# Altium PCB Device.PcbDoc (part 1 of 2)
Units mil, origin at the board's own origin, x right, y up, seen from the top; angles counter-clockwise.
Board outline 1614.17 x 1181.1 mil, 2 copper layers (Top Layer, Bottom Layer); 72 components, 59 nets, 280 pads, 52 vias.
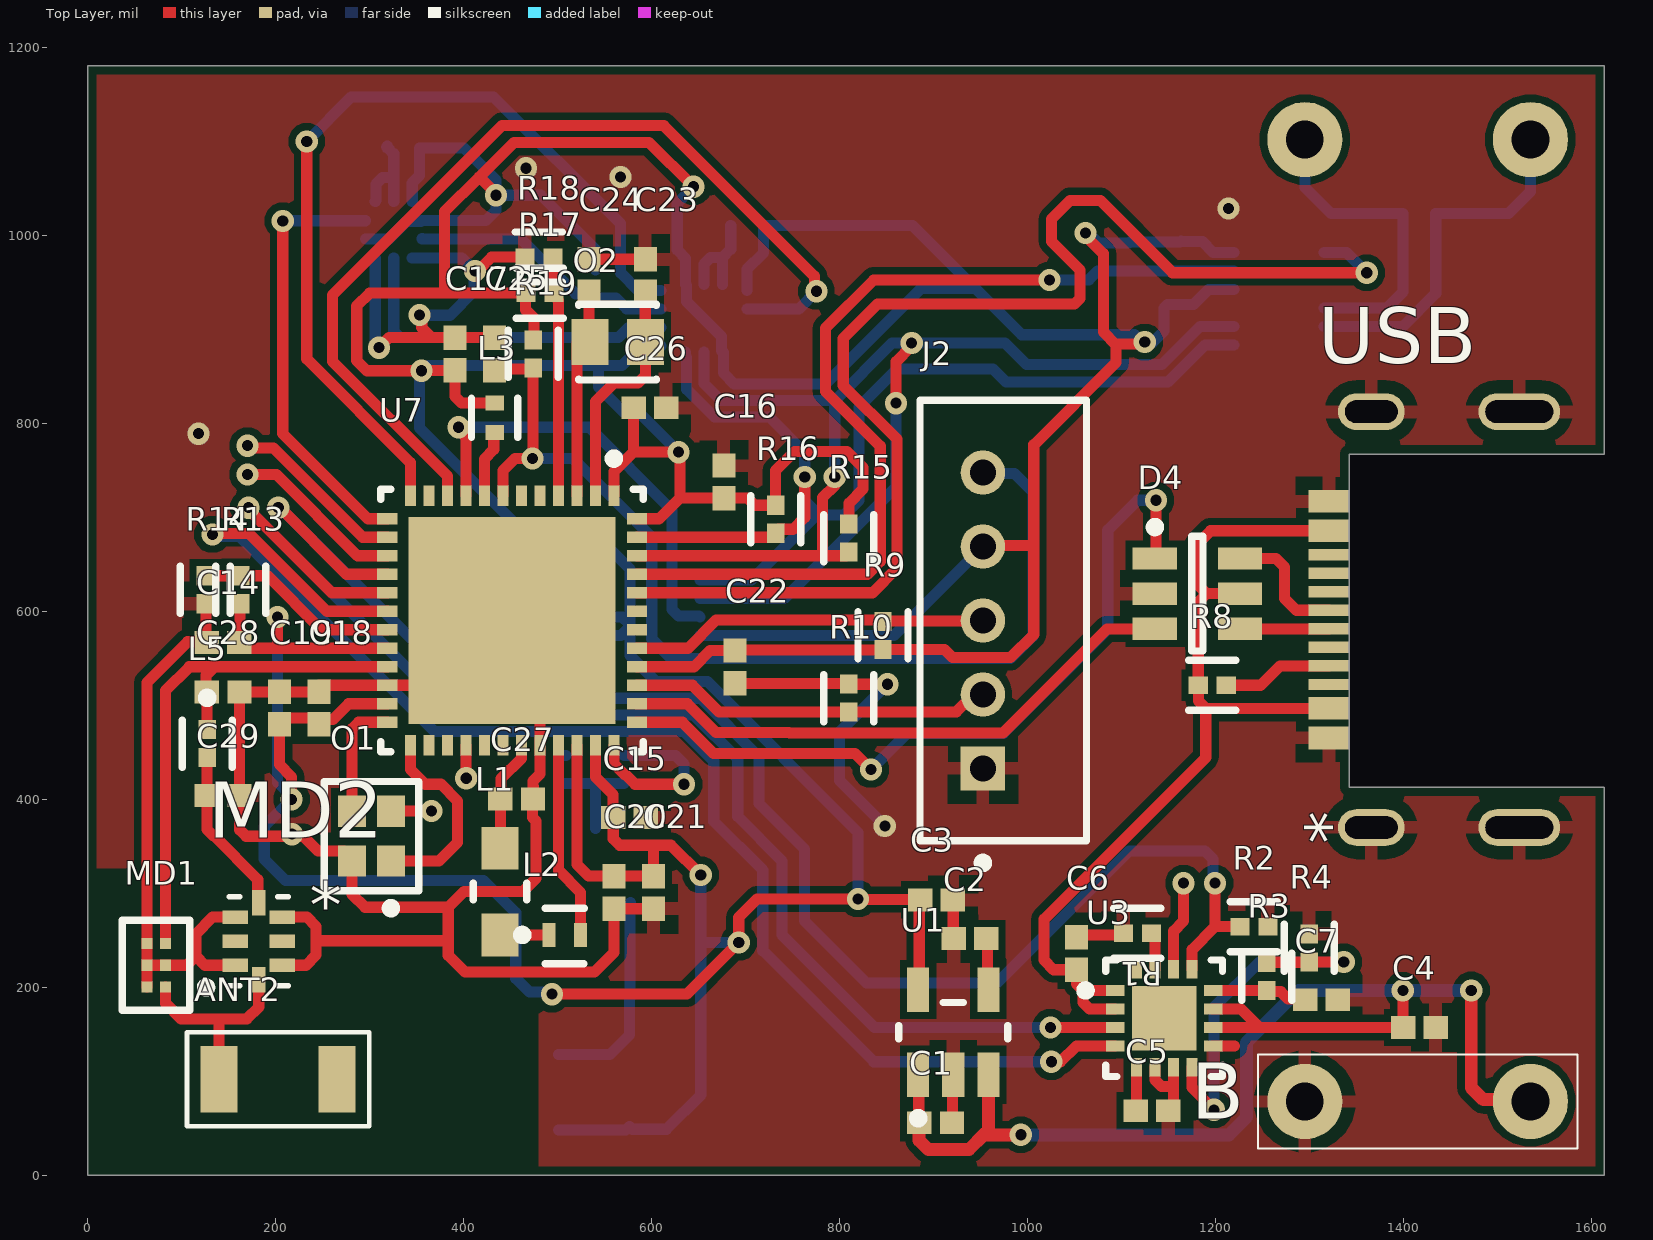
[diagram p0: Top Layer view]
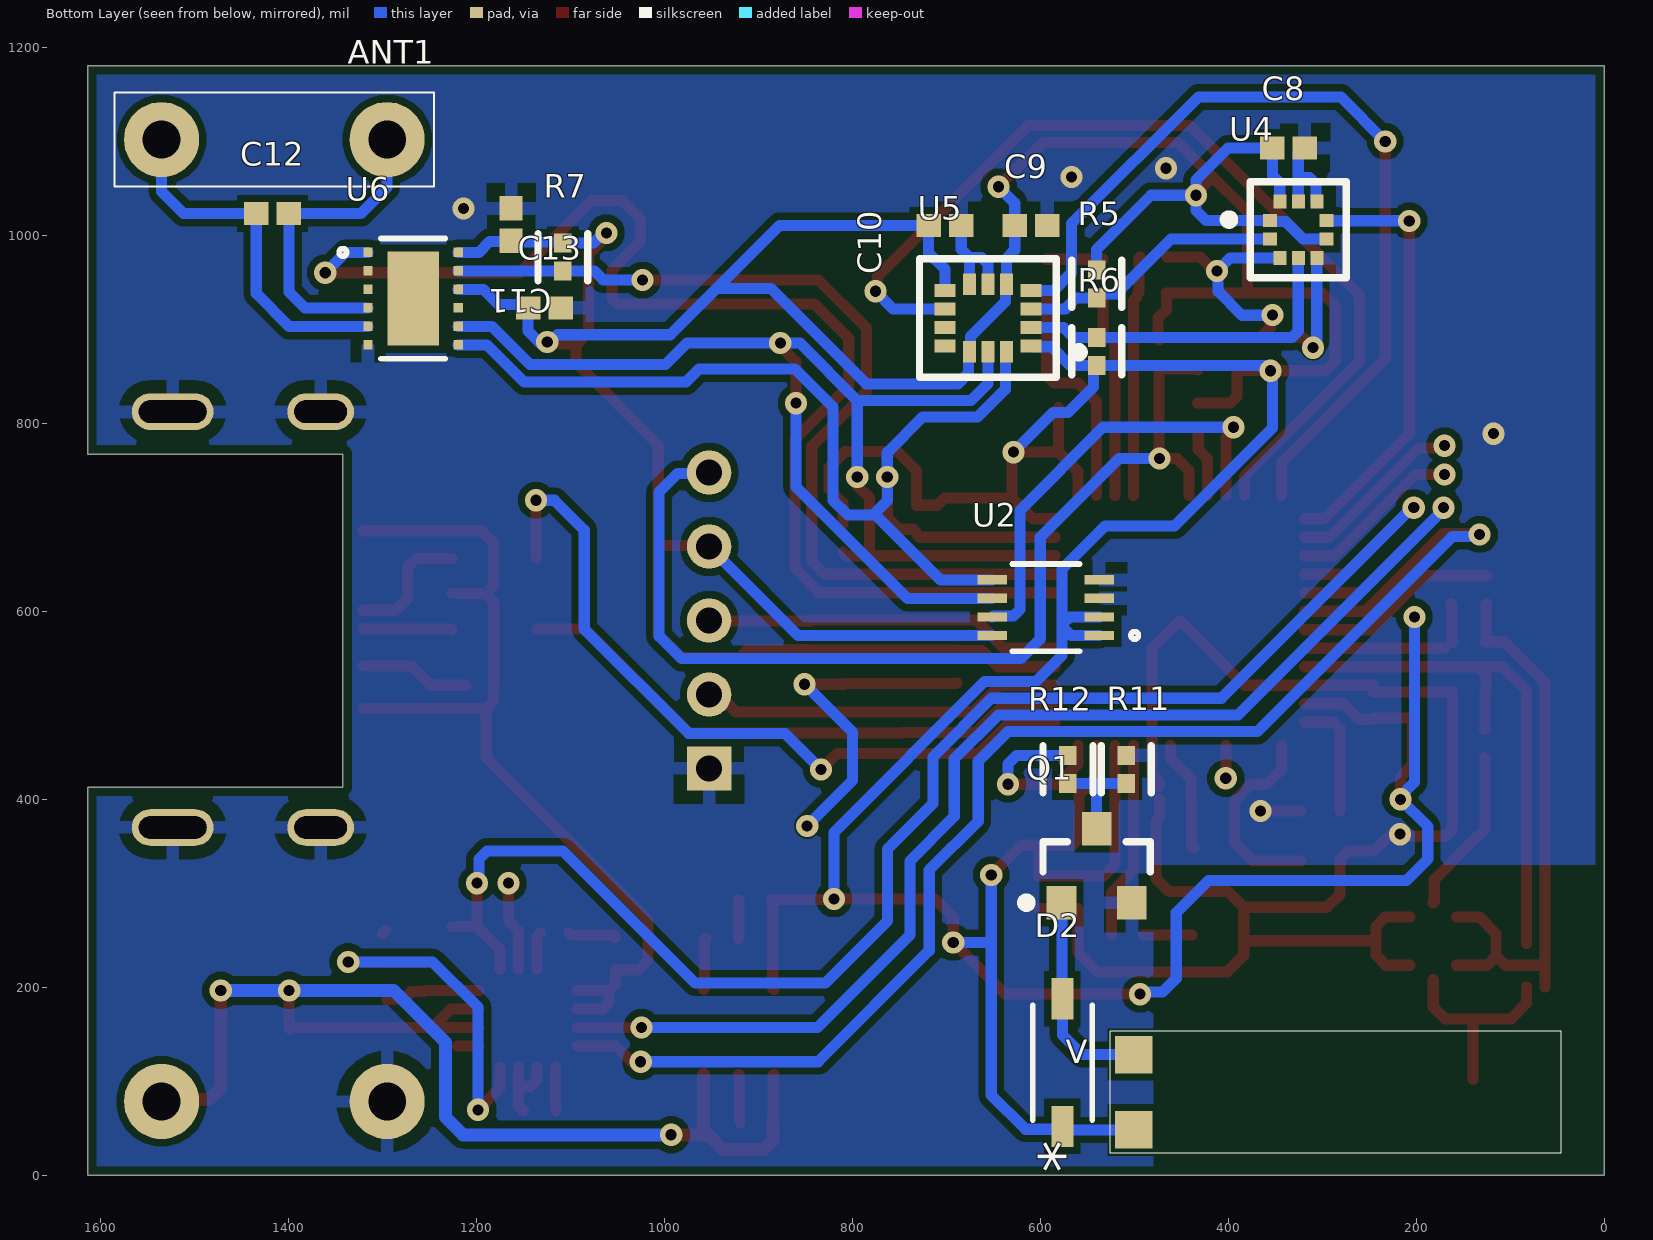
[diagram p1: Bottom Layer view, seen from below]

## Layer stack, top to bottom
Top Solder: solder mask 0.4, Solder Resist, Dk 3.5
Top Layer: signal copper 1.4
Dielectric 1: dielectric 12.6, FR-4, Dk 4.8
Bottom Layer: signal copper 1.4
Bottom Solder: solder mask 0.4, Solder Resist, Dk 3.5

## Board outline
0,0 0,1181.1 1614.17,1181.1 1614.17,767.72 1342.52,767.72 1342.52,413.39 1614.17,413.39 1614.17,0

## Design rules (kind name [scope] priority, off if disabled: settings)
AcuteAngle [All] p1: minimum=3.50000000000000E+0001 checktracksonly=FALSE
BoardOutlineClearance "BoardOutlineClearance 1" [All] p1: gap=9.84 ignorepadtopadclearanceinfootprint=FALSE except(0: Arc-SplitContinuation Track-SplitContinuation SMDPad-SplitContinuation THPad-SplitContinuation Via-SplitContinuation Fill-SplitContinuation Poly-SplitContinuation Region-SplitContinuation Text-SplitContinuation) // Milling
BoardOutlineClearance "BoardOutlineClearance 2" [All] p2: gap=15.75 ignorepadtopadclearanceinfootprint=FALSE except(0: Arc-SplitContinuation Track-SplitContinuation SMDPad-SplitContinuation THPad-SplitContinuation Via-SplitContinuation Fill-SplitContinuation Poly-SplitContinuation Region-SplitContinuation Text-SplitContinuation) // V-Cut
Clearance "Clearance 3 Oz" [All] p1 off: gap=13.78 ignorepadtopadclearanceinfootprint=FALSE except(9.84: Arc-Hole Track-Hole SMDPad-Hole THPad-Hole Via-Hole Fill-Hole Poly-Hole Region-Hole Text-Hole)
Clearance "Clearance 2 Oz" [All] p2 off: gap=11.81 ignorepadtopadclearanceinfootprint=FALSE except(9.84: Arc-Hole Track-Hole SMDPad-Hole THPad-Hole Via-Hole Fill-Hole Poly-Hole Region-Hole Text-Hole)
Clearance "Clearance-1 1 Oz" [All] p3 off: gap=7.87 ignorepadtopadclearanceinfootprint=FALSE except(9.84: Arc-Hole Track-Hole SMDPad-Hole THPad-Hole Via-Hole Fill-Hole Poly-Hole Region-Hole Text-Hole) // Standart
Clearance "Clearance-2 1 Oz" [All] p4: gap=5.91 ignorepadtopadclearanceinfootprint=FALSE except(7.87: Arc-Fill Arc-Poly Track-Fill Track-Poly SMDPad-Fill SMDPad-Poly THPad-Fill THPad-Poly Via-Fill Via-Poly Fill-Fill Fill-Poly Poly-Poly; 9.84: Arc-Hole Track-Hole SMDPad-Hole THPad-Hole Via-Hole Fill-Hole Poly-Hole Region-Hole Text-Hole) // Advance
Clearance "Clearance-1 1/2 Oz" [All] p5 off: gap=4.92 ignorepadtopadclearanceinfootprint=FALSE except(7.87: Arc-Fill Arc-Poly Track-Fill Track-Poly SMDPad-SMDPad SMDPad-Fill SMDPad-Poly THPad-Fill THPad-Poly Via-Fill Via-Poly Fill-Fill Fill-Poly Poly-Poly Poly-Region Poly-Text; 9.84: Arc-Hole Track-Hole SMDPad-Hole THPad-Hole Via-Hole Fill-Hole Poly-Hole Region-Hole Text-Hole) // Standart
Clearance "Clearance-2 1/2 Oz" [All] p6 off: gap=3.94 ignorepadtopadclearanceinfootprint=FALSE except(5.91: Arc-Fill Arc-Poly Track-Fill Track-Poly SMDPad-SMDPad SMDPad-Fill SMDPad-Poly THPad-Fill THPad-Poly Via-Fill Via-Poly Fill-Fill Fill-Poly Poly-Poly Poly-Region Poly-Text; 9.84: Arc-Hole Track-Hole SMDPad-Hole THPad-Hole Via-Hole Fill-Hole Poly-Hole Region-Hole Text-Hole) // Advance
DiffPairsRouting "DiffPairsRouting 1 Oz" [All] p1: maxlimit=10 minlimit=7.87 mostfreqgap=10 toplayer_minwidth=7.87 toplayer_maxwidth=15 toplayer_prefwidth=15 bottomlayer_minwidth=7.87 bottomlayer_maxwidth=15 bottomlayer_prefwidth=15 maxuncoupledlength=500
DiffPairsRouting "DiffPairsRouting 1/2 Oz" [All] p2: maxlimit=10 minlimit=3.94 mostfreqgap=10 toplayer_minwidth=3.94 toplayer_maxwidth=15 toplayer_prefwidth=15 bottomlayer_minwidth=3.94 bottomlayer_maxwidth=15 bottomlayer_prefwidth=15 maxuncoupledlength=500
HoleSize "Minimum HoleSize" [IsPad] p1: absolutevalues=TRUE maxlimit=232.28 minlimit=23.62 maxpercent=80.000 minpercent=20.000
HoleSize "Minimum HoleSize VIA 1" [IsVia] p2: absolutevalues=TRUE maxlimit=232.28 minlimit=11.81 maxpercent=80.000 minpercent=20.000 // Standart
HoleSize "Minimum HoleSize VIA 2" [IsVia] p3: absolutevalues=TRUE maxlimit=232.28 minlimit=7.87 maxpercent=80.000 minpercent=20.000 // Advance
HoleToHoleClearance Hole2HoleClearance [All] p1: gap=9.84 allowstackedmicrovias=FALSE
MinimumAnnularRing "Minimum AR VIA Standart" [IsVia] p1: minimumring=5.91
MinimumAnnularRing "Minimum AR PAD Standart" [IsPAD] p2: minimumring=7.87
MinimumAnnularRing "Minimum AR VIA Advance" [IsVia] p3: minimumring=3.94
MinimumAnnularRing "Minimum AR PAD Advance" [IsPAD] p4: minimumring=5.91
MinimumSolderMaskSliver "SolderMask Bridge Standart" [All] p1: minsoldermaskwidth=5.91 // All Masks
MinimumSolderMaskSliver "SolderMask Bridge Advance" [All] p2: minsoldermaskwidth=3.94 // Mask LDI
PlaneClearance "PlaneClearance 3 Oz" [All] p1: clearance=13.78
PlaneClearance "PlaneClearance 2 Oz" [All] p2: clearance=11.81
PlaneClearance "PlaneClearance 1 Oz" [All] p3: clearance=7.87
PlaneClearance "PlaneClearance-1 1/2 Oz" [All] p4: clearance=7.87 // Standart
PlaneClearance "PlaneClearance-2 1/2 Oz" [All] p5: clearance=5.91 // Advance
PlaneConnect "TermalConnect 3 Oz" [All] p1: planeconnectstyle=Relief reliefexpansion=7.87 reliefentries=4 reliefconductorwidth=13.78 reliefairgap=13.78 // Standart
PlaneConnect "TermalConnect 2 Oz" [All] p2: planeconnectstyle=Relief reliefexpansion=7.87 reliefentries=4 reliefconductorwidth=11.81 reliefairgap=11.81 // Standart
PlaneConnect "TermalConnect-1 1 Oz" [All] p3: planeconnectstyle=Relief reliefexpansion=7.87 reliefentries=4 reliefconductorwidth=7.87 reliefairgap=7.87 // Standart
PlaneConnect "TermalConnect-2 1 Oz" [All] p4: pad.planeconnectstyle=Relief pad.reliefexpansion=5.91 pad.reliefentries=4 pad.reliefconductorwidth=7.87 pad.reliefairgap=7.87 via.planeconnectstyle=Direct via.reliefexpansion=5.91 via.reliefentries=4 via.reliefconductorwidth=5.91 via.reliefairgap=5.91 // Advance
PlaneConnect "TermalConnect-1 1/2 Oz" [All] p5: planeconnectstyle=Relief reliefexpansion=7.87 reliefentries=4 reliefconductorwidth=7.87 reliefairgap=7.87 // Standart
PlaneConnect "TermalConnect-2 1/2 Oz" [All] p6: pad.planeconnectstyle=Relief pad.reliefexpansion=5.91 pad.reliefentries=4 pad.reliefconductorwidth=5.91 pad.reliefairgap=5.91 via.planeconnectstyle=Direct via.reliefexpansion=5.91 via.reliefentries=4 via.reliefconductorwidth=5.91 via.reliefairgap=5.91 // Advance
PolygonConnect "PolygonConnect 3 Oz" [All] p1: thpad.connectstyle=Relief thpad.reliefconductorwidth=13.78 thpad.reliefentries=4 thpad.polygonreliefangle="90 Angle" thpad.airgapwidth=13.78 smdpad.connectstyle=Relief smdpad.reliefconductorwidth=13.78 smdpad.reliefentries=4 smdpad.polygonreliefangle="90 Angle" smdpad.airgapwidth=13.78 via.connectstyle=Direct via.reliefconductorwidth=10 via.reliefentries=4 via.polygonreliefangle="90 Angle" via.airgapwidth=10
PolygonConnect "PolygonConnect 2 Oz" [All] p2: thpad.connectstyle=Relief thpad.reliefconductorwidth=11.81 thpad.reliefentries=4 thpad.polygonreliefangle="90 Angle" thpad.airgapwidth=11.81 smdpad.connectstyle=Relief smdpad.reliefconductorwidth=11.81 smdpad.reliefentries=4 smdpad.polygonreliefangle="90 Angle" smdpad.airgapwidth=11.81 via.connectstyle=Direct via.reliefconductorwidth=10 via.reliefentries=4 via.polygonreliefangle="90 Angle" via.airgapwidth=10
PolygonConnect "PolygonConnect-1 1 Oz" [All] p3: thpad.connectstyle=Relief thpad.reliefconductorwidth=7.87 thpad.reliefentries=4 thpad.polygonreliefangle="90 Angle" thpad.airgapwidth=7.87 smdpad.connectstyle=Relief smdpad.reliefconductorwidth=7.87 smdpad.reliefentries=4 smdpad.polygonreliefangle="90 Angle" smdpad.airgapwidth=7.87 via.connectstyle=Direct via.reliefconductorwidth=10 via.reliefentries=4 via.polygonreliefangle="90 Angle" via.airgapwidth=10 // Standart
PolygonConnect "PolygonConnect-2 1 Oz" [All] p4: thpad.connectstyle=Relief thpad.reliefconductorwidth=5.91 thpad.reliefentries=4 thpad.polygonreliefangle="90 Angle" thpad.airgapwidth=5.91 smdpad.connectstyle=Relief smdpad.reliefconductorwidth=5.91 smdpad.reliefentries=4 smdpad.polygonreliefangle="90 Angle" smdpad.airgapwidth=5.91 via.connectstyle=Direct via.reliefconductorwidth=10 via.reliefentries=4 via.polygonreliefangle="90 Angle" via.airgapwidth=10 // Advance
PolygonConnect "PolygonConnect-1 1/2 Oz" [All] p5: thpad.connectstyle=Relief thpad.reliefconductorwidth=5.91 thpad.reliefentries=4 thpad.polygonreliefangle="90 Angle" thpad.airgapwidth=7.87 smdpad.connectstyle=Relief smdpad.reliefconductorwidth=7.87 smdpad.reliefentries=4 smdpad.polygonreliefangle="90 Angle" smdpad.airgapwidth=7.87 via.connectstyle=Direct via.reliefconductorwidth=10 via.reliefentries=4 via.polygonreliefangle="90 Angle" via.airgapwidth=10 // Standart
PolygonConnect "PolygonConnect-2 1/2 Oz" [All] p6: thpad.connectstyle=Relief thpad.reliefconductorwidth=4.92 thpad.reliefentries=4 thpad.polygonreliefangle="90 Angle" thpad.airgapwidth=5.91 smdpad.connectstyle=Relief smdpad.reliefconductorwidth=4.92 smdpad.reliefentries=4 smdpad.polygonreliefangle="90 Angle" smdpad.airgapwidth=5.91 via.connectstyle=Direct via.reliefconductorwidth=10 via.reliefentries=4 via.polygonreliefangle="90 Angle" via.airgapwidth=10 // Advance
RoomDefinition U_USB [InComponentClass('U_USB')] p1: confinementstyle=ConfineIn formatcopy=TRUE lockcomponents=FALSE outline 1072.83,334.65 1653.54,334.65 1653.54,846.46 1072.83,846.46
RoomDefinition U_STM32WB55CGU6 [InComponentClass('U_STM32WB55CGU6')] p2: confinementstyle=ConfineIn formatcopy=TRUE lockcomponents=FALSE outline -39.37,-39.37 845.28,-39.37 845.28,1220.47 -39.37,1220.47
RoomDefinition U_LSM6DSRXTR [InComponentClass('U_LSM6DSRXTR')] p3: confinementstyle=ConfineIn formatcopy=TRUE lockcomponents=FALSE outline 845.47,1220.47 478.35,1220.47 478.35,768.7 845.47,768.7
RoomDefinition U_LPS22HBTR [InComponentClass('U_LPS22HBTR')] p4: confinementstyle=ConfineIn formatcopy=TRUE lockcomponents=FALSE outline 214.57,922.24 478.35,922.24 478.35,1220.47 214.57,1220.47
RoomDefinition U_LD3985M33R [InComponentClass('U_LD3985M33R')] p5: confinementstyle=ConfineIn formatcopy=TRUE lockcomponents=FALSE outline 845.47,-39.37 1000.98,-39.37 1000.98,334.65 845.47,334.65
RoomDefinition U_ST25DV64K-JFR6D3 [InComponentClass('U_ST25DV64K-JFR6D3')] p6: confinementstyle=ConfineIn formatcopy=TRUE lockcomponents=FALSE outline 845.47,847.44 1653.54,847.44 1653.54,1220.47 845.47,1220.47
RoomDefinition U_M24512-DFMC6TG [InComponentClass('U_M24512-DFMC6TG')] p7: confinementstyle=ConfineIn formatcopy=TRUE lockcomponents=FALSE outline 717.52,692.91 479.33,692.91 479.33,515.75 717.52,515.75
RoomDefinition U_VIBRO [InComponentClass('U_VIBRO')] p8: confinementstyle=ConfineIn formatcopy=TRUE lockcomponents=FALSE outline 643.7,-37.4 643.7,540.35 18.7,540.35 18.7,-37.4
RoomDefinition U_SWD [InComponentClass('U_SWD')] p9: confinementstyle=ConfineIn formatcopy=TRUE lockcomponents=FALSE outline 688.98,295.28 1072.83,295.28 1072.83,846.46 688.98,846.46
RoomDefinition U_L6924D013TR [InComponentClass('U_L6924D013TR')] p10: confinementstyle=ConfineIn formatcopy=TRUE lockcomponents=FALSE outline 1001.97,-39.37 1653.54,-39.37 1653.54,334.65 1001.97,334.65
RoutingCorners [All] p1 off: cornerstyle=45-Degree minsetback=100 maxsetback=100
RoutingVias [All] p1: holewidth=11.81 width=23.62 viastyle="Through Hole" minholewidth=7.87 minwidth=15.75 maxholewidth=232.28 maxwidth=251.97
SilkToSilkClearance Silk2SilkClearance [All] p1 off: silktosilkclearance=5.91
SilkToSolderMaskClearance Silk2SolderMaskClearance [IsPad] p1 off: minsilkscreentomaskgap=5.91 clearancetoexposedcopper=TRUE
SolderMaskExpansion SolderMaskExpansion-1 [All] p1: expansion=1.97 istentingtop=FALSE // Standart
SolderMaskExpansion "SolderMaskExpansion LDI" [All] p2: expansion=0.98 istentingtop=FALSE // Advance
UnRoutedNet [All] p1: checkbadconnections=TRUE
Width "Width 3 Oz" [All] p1 off: maxlimit=393.7 minlimit=13.78 preferedwidth=15.75 checkconnectedcopper=TRUE
Width "Width 2 Oz" [All] p2: maxlimit=393.7 minlimit=11.81 preferedwidth=13.78 minimp=50.000000 maximp=50.000000 favimp=50.000000 checkconnectedcopper=TRUE
Width "Width 1 Oz" [All] p3: maxlimit=393.7 minlimit=5.91 preferedwidth=7.87 checkconnectedcopper=TRUE
Width "Width 1/2 Oz" [All] p4: maxlimit=393.7 minlimit=3.94 preferedwidth=4.92 checkconnectedcopper=TRUE
20 further rules are at their usual default settings.

## Classes and differential pairs
component class U_VIBRO: D2 Q1 R11 R12 V
component class U_USB: D4 R8 USB
component class U_SWD: J2 R9 R10
component class U_STM32WB55CGU6: ANT2 C14 C15 C16 C17 C18 C19 C20 C21 C22 C23 C24 C25 C26 C27 C28 C29 L1 L2 L3 L5 MD1 MD2 O1 O2 R13 R14 R15 R16 R17 R18 R19 U7
component class U_ST25DV64K-JFR6D3: ANT1 C11 C12 C13 R7 U6
component class U_M24512-DFMC6TG: U2
component class U_LSM6DSRXTR: C9 C10 R5 R6 U5
component class U_LPS22HBTR: C8 U4
component class U_LD3985M33R: C1 C2 C3 U1
component class U_L6924D013TR: B C4 C5 C6 C7 R1 R2 R3 R4 U3

## Components (designator, comment, footprint, x,y, rotation, side; value= is the part's Value field where it differs from the comment)
ANT1 "NFC-ANT" NFC-ANT 1415.43,1102.36 r180 bottom
ANT2 "KH3216-A55" KH3216-A55 204.72,102.36 r270 top
B "BAT-CON" BAT-CON 1415.43,78.74 r180 top
C1 "10 uF" CAPC1005X55X25NL05T10 902.56,56.1 r180 top
C2 "10 nF" CAPC1005X55X25NL05T10 938.98,251.97 r0 top
C3 "1 uF" CAPC1005X55X25NL05T10 903.54,293.31 r180 top
C4 "1 uF" CAPC1005X55X25NL05T10 1417.32,157.48 r180 top
C5 "330 pF" CAPC1005X55X25NL05T10 1132.87,68.9 r0 top
C6 "1 uF" CAPC1005X55X25NL05T10 1052.17,236.22 r90 top
C7 "1 uF" CAPC1005X55X25NL05T10 1312.99,187.01 r180 top
C8 "4.7 uF" CAPC1005X55X25NL05T10 336.02,1093.5 r0 bottom
C9 "100 nF" CAPC1005X55X25NL05T10 610.24,1010.83 r0 bottom
C10 "100 nF" CAPC1005X55X25NL05T10 701.77,1010.83 r0 bottom
C11 "470 nF" CAPC1005X55X25NL05T10 1163.39,1011.81 r270 bottom
C12 "0 uF" CAPC1005X55X25NL05T10 1417.32,1023.62 r0 bottom
C13 "1 uF" CAPC1005X55X25NL05T10 1127.95,923.23 r180 bottom
C14 "100 nF" CAPC1005X55X25NL05T10 144.17,567.29 r180 top
C15 "100 nF" CAPC1005X55X25NL05T10 576.77,380.91 r180 top
C16 "100 nF" CAPC1005X55X25NL05T10 677.17,738.19 r90 top
C17 "100 nF" CAPC1005X55X25NL05T10 391.17,874.29 r270 top
C18 "100 nF" CAPC1005X55X25NL05T10 246.17,497.29 r90 top
C19 "100 pF" CAPC1005X55X25NL05T10 204.17,497.29 r270 top
C20 "4.7 uF" CAPC1005X55X25NL05T10 560.04,301.18 r90 top
C21 "100 nF" CAPC1005X55X25NL05T10 602.36,301.18 r270 top
C22 "100 nF" CAPC1005X55X25NL05T10 689.17,541.29 r90 top
C23 "4.3 pF" CAPC1005X55X25NL05T10 593.5,957.68 r90 top
C24 "4.3 pF" CAPC1005X55X25NL05T10 533.46,957.68 r270 top
C25 "100 nF" CAPC1005X55X25NL05T10 433.17,874.29 r270 top
C26 "100 nF" CAPC1005X55X25NL05T10 598.43,816.93 r180 top
C27 "4.7 uF" CAPC1005X55X25NL05T10 456.69,400.59 r0 top
C28 "0.8 pF" CAPC1005X55X25NL05T10 144.34,514.65 r0 top
C29 "0.3 pF" CAPC1005X55X25NL05T10 144.34,404.42 r0 top
D2 "BAT43W-7-F" BAT43W-7-F 575.79,118.11 r90 bottom
D4 "USBLC6-2SC6" STM-SOT23-6L_V 1181.1,619.09 r0 top
J2 "B5B-PH-K-S(LF)(SN)" FP-B5B-PH-K-S_LF_SN-MFG 974.41,590.55 r90 top
L1 "10uh" FP-LQM21FN_70-MFG 438.98,302.17 r90 top
L2 "10nh" FP-LQG15WH_02-MFG 507.87,255.91 r0 top
L3 "FBH1005-601Y" FP-BLM15-0_05-MFG 433.17,806.29 r270 top
L5 "2.7 nH" FP-LQG15HH_02-IPC_C 127.21,459.54 r270 top
MD1 "MLPF-WB55-01E3" FP-MLPF-WB55-01E3-MFG 72.94,223.67 r180 top
MD2 "LFL212G45TC1A007" LFL212G45TC1A007 182.2,249.26 r0 top
O1 "NX2016SA-32MHZ" FP-NX2016SA-MFG 302.17,361.22 r90 top
O2 "NX2012SA-32.768K" FP-NX2012SA-MFG 563.98,886.81 r180 top
Q1 "DMG3420U-7" DIOD-SOT23-3_B_V 540.35,329.72 r90 bottom
R1 "130 Kohm" FP-RC1005-IPC_C 1117.13,257.87 r180 top
R2 "3.3 Kohm" FP-RC1005-IPC_C 1241.14,264.76 r0 top
R3 "1 Kohm" FP-RC1005-IPC_C 1254.92,211.61 r90 top
R4 "470 ohm" FP-RC1005-IPC_C 1300.2,242.13 r90 top
R5 "10 Kohm" FP-RC1005-IPC_C 540.35,948.82 r90 bottom
R6 "10 Kohm" FP-RC1005-IPC_C 540.35,876.97 r270 bottom
R7 "4.7 Kohm" FP-RC1005-IPC_C 1108.27,977.36 r270 bottom
R8 "5.3 Kohm" FP-RC1005-IPC_C 1196.85,521.65 r0 top
R9 "10 Kohm" FP-RC1005-IPC_C 846.46,574.8 r90 top
R10 "10 Kohm" FP-RC1005-IPC_C 810.04,507.87 r270 top
R11 "100 Kohm" FP-RC1005-IPC_C 508.86,432.09 r90 bottom
R12 "100 ohm" FP-RC1005-IPC_C 570.87,432.09 r90 bottom
R13 "0 ohm" FP-RC1005-IPC_C 163.17,623.29 r270 top
R14 "0 ohm" FP-RC1005-IPC_C 125.17,623.29 r270 top
R15 "? ohm" FP-RC1005-IPC_C 810.17,678.29 r90 top
R16 "? ohm" FP-RC1005-IPC_C 732.17,698.29 r90 top
R17 "0 ohm" FP-RC1005-IPC_C 481.3,938.98 r180 top
R18 "0 ohm" FP-RC1005-IPC_C 480.31,977.36 r180 top
R19 "100 Kohm" FP-RC1005-IPC_C 474.17,874.29 r90 top
U1 "LD3985M33R" FP-SOT23-5L-7049676-MFG 921.26,152.56 r90 top
U2 "M24512-DFMC6TG" M24512-DFMC6TG 595.47,608.27 r0 bottom
U3 "L6924D013TR" FP-VFQFPN16-7185330-MFG 1145.67,167.32 r0 top
U4 "LPS22HBTR" FP-HLGA-10L-8479831-0 325.79,1006.4 r180 bottom
U5 "LSM6DSRXTR" FP-LGA-14L-DM00249496-MFG 656,912.4 r0 bottom
U6 "ST25DV64K-JFR6D3" ST25DV64K-JFR6D3 1267.72,933.07 r180 bottom
U7 "STM32WB55CGU6" FP-STM32WB55CGU6-MFG 451.77,590.55 r270 top
USB "USB4510-03-1-A" USB4510-03-1-A 1476.38,590.55 r90 top
V "VIBRO" VIBRO 500.98,88.58 r90 bottom

## Footprints (in the part's own frame and the unit in brackets; to place one, negate y for a bottom-side part, rotate by r counter-clockwise, add the part's x,y. Pads: shape width x height; smd on the part's side, far side on the other; paste and mask are expansions set on the pad)
BAT43W-7-F [mil]
  rect 43.75x23.65 smd paste+0 mask+0: 1(-65.91,1) 2(69.91,1)
  silkscreen extent -59,-31 63,33
BAT-CON [mil]
  round 80 hole 40: 1(-120,0) 2(120,0)
  silkscreen extent -170,-50 170,50
CAPC1005X55X25NL05T10 [mm] "Chip Capacitor, 2-Leads, Body 1.00x0.50mm, IPC Medium Density"
  rect 0.66x0.62 smd: 1(-0.44,0) 2(0.44,0)
  body extent -0.53,-0.28 0.53,0.27, height 0.55
DIOD-SOT23-3_B_V [mm] "SOT23, 3-Leads, Body 2.9x1.3mm, Pitch 0.95mm"
  rect 0.9x0.8 smd: 1(-1,0.95) 2(-1,-0.95) 3(1,0)
  silkscreen extent -1.12,-1.45 0.65,2.03, body extent -0.65,-1.45 0.65,1.45, height 1.17
FP-B5B-PH-K-S_LF_SN-MFG [mm]
  rect 1.2x1.2 hole 0.7 paste-1000 mask+0: 1(-4,0.55)
  round 1.2 hole 0.7 paste-1000 mask+0: 2(-2,0.55) 3(0,0.55) 4(2,0.55) 5(4,0.55)
  silkscreen extent -6.67,-2.25 5.95,2.25, body extent -6.05,-2.35 6.05,2.35, height 0.25
FP-BLM15-0_05-MFG [mm]
  rect 0.4x0.5 smd paste+0 mask+0: 1(-0.4,0) 2(0.4,0)
  silkscreen extent -0.53,-0.63 0.52,0.63, body extent -0.7,-0.38 0.7,0.38, height 0.25
FP-HLGA-10L-8479831-0 [mm]
  rect 0.375x0.35 smd paste+0 mask+0: 1(-0.763,0.25) 2(-0.763,-0.25) 6(0.763,-0.25) 7(0.763,0.25)
  rect 0.35x0.375 smd paste+0 mask+0: 3(-0.5,-0.763) 4(0,-0.763) 5(0.5,-0.763) 8(0.5,0.763) 9(0,0.763) 10(-0.5,0.763)
  silkscreen extent -2,-1.3 1.3,1.3, body extent -1,-1 1,1, height 0.8
FP-LGA-14L-DM00249496-MFG [mm]
  rect 0.575x0.35 smd paste-1000 mask+0: 1(-1.162,0.75) 2(-1.162,0.25) 3(-1.162,-0.25) 4(-1.162,-0.75) 8(1.162,-0.75) 9(1.162,-0.25) 10(1.162,0.25) 11(1.162,0.75)
  rect 0.35x0.575 smd paste-1000 mask+0: 5(-0.5,-0.913) 6(0,-0.913) 7(0.5,-0.913) 12(0.5,0.913) 13(0,0.913) 14(-0.5,0.913)
  silkscreen extent -2.57,-1.6 1.85,1.6, body extent -1.5,-1.25 1.5,1.25, height 0.86
FP-LQG15HH_02-IPC_C [mil]
  rect 20.29x18.6 smd paste+0 mask+0: 1(-14.9,0) 2(14.9,0)
  silkscreen extent -54,-27 25,27, body extent -29,-15 29,15, height 10
FP-LQG15WH_02-MFG [mm]
  rect 0.35x0.65 smd paste+0 mask+0: 1(-0.425,0) 2(0.425,0)
  silkscreen extent -1.27,-0.78 0.53,0.72, body extent -0.7,-0.43 0.7,0.43, height 0.25
FP-LQM21FN_70-MFG [mm]
  rect 1.15x1 smd paste+0 mask+0: 1(-1.175,0) 2(1.175,0)
  silkscreen extent -0.23,-0.72 0.23,0.72, body extent -1.85,-0.82 1.85,0.82, height 0.25
FP-MLPF-WB55-01E3-MFG [mm]
  rect 0.3x0.3 smd paste-1000 mask-1000: A1(-0.25,0.587) A2(-0.25,0) A3(-0.25,-0.587) B1(0.25,0.587) B2(0.25,0) B3(0.25,-0.587)
  silkscreen extent -1.48,-1.21 0.91,1.21, body extent -1.01,-1.31 1.01,1.31, height 0.25
FP-NX2012SA-MFG [mm]
  rect 1x1.25 smd paste+0 mask+0: 1(-0.75,0) 2(0.75,0)
  silkscreen extent -1.05,-1.02 1.05,1.02, body extent -1.35,-0.72 1.35,0.72, height 0.25
FP-NX2016SA-MFG [mm]
  rect 0.85x0.75 smd paste+0 mask+0: 1(-0.675,-0.525) 2(0.675,-0.525) 3(0.675,0.525) 4(-0.675,0.525)
  silkscreen extent -2.07,-1.28 1.48,1.28, body extent -1.2,-1 1.2,1, height 0.25
FP-RC1005-IPC_C [mil]
  rect 20.29x18.6 smd paste+0 mask+0: 1(-14.9,0) 2(14.9,0)
  silkscreen extent -25,-27 25,27, body extent -29,-15 29,15, height 10
FP-SOT23-5L-7049676-MFG [mm]
  rect 1.2x0.6 smd paste+0 mask+0: 1(-1.15,0.95) 2(-1.15,0) 3(-1.15,-0.95) 4(1.15,-0.95) 5(1.15,0.95)
  silkscreen extent -2.45,-1.48 0.8,1.47, body extent -1.85,-1.58 1.85,1.57, height 0.25
FP-STM32WB55CGU6-MFG [mm]
  rect 0.55x0.3 smd paste+0 mask+0: 1(-3.375,2.75) 2(-3.375,2.25) 3(-3.375,1.75) 4(-3.375,1.25) 5(-3.375,0.75) 6(-3.375,0.25) 7(-3.375,-0.25) 8(-3.375,-0.75) 9(-3.375,-1.25) 10(-3.375,-1.75) 11(-3.375,-2.25) 12(-3.375,-2.75) 25(3.375,-2.75) 26(3.375,-2.25) 27(3.375,-1.75) 28(3.375,-1.25) 29(3.375,-0.75) 30(3.375,-0.25) 31(3.375,0.25) 32(3.375,0.75) 33(3.375,1.25) 34(3.375,1.75) 35(3.375,2.25) 36(3.375,2.75)
  rect 0.3x0.55 smd paste+0 mask+0: 13(-2.75,-3.375) 14(-2.25,-3.375) 15(-1.75,-3.375) 16(-1.25,-3.375) 17(-0.75,-3.375) 18(-0.25,-3.375) 19(0.25,-3.375) 20(0.75,-3.375) 21(1.25,-3.375) 22(1.75,-3.375) 23(2.25,-3.375) 24(2.75,-3.375) 37(2.75,3.375) 38(2.25,3.375) 39(1.75,3.375) 40(1.25,3.375) 41(0.75,3.375) 42(0.25,3.375) 43(-0.25,3.375) 44(-0.75,3.375) 45(-1.25,3.375) 46(-1.75,3.375) 47(-2.25,3.375) 48(-2.75,3.375)
  rect 5.6x5.6 smd paste+0 mask+0: 49(0,0)
  silkscreen extent -4.5,-3.55 3.55,3.55, body extent -3.75,-3.75 3.75,3.75, height 0.25
FP-VFQFPN16-7185330-MFG [mm]
  rect 0.5x0.3 smd paste+0 mask+0: 1(-1.325,0.75) 2(-1.325,0.25) 3(-1.325,-0.25) 4(-1.325,-0.75) 9(1.325,-0.75) 10(1.325,-0.25) 11(1.325,0.25) 12(1.325,0.75)
  rect 0.3x0.5 smd paste+0 mask+0: 5(-0.75,-1.325) 6(-0.25,-1.325) 7(0.25,-1.325) 8(0.75,-1.325) 13(0.75,1.325) 14(0.25,1.325) 15(-0.25,1.325) 16(-0.75,1.325)
  rect 1.75x1.75 smd paste+0 mask+0: 17(0,0)
  silkscreen extent -2.25,-1.58 1.58,1.58, body extent -1.68,-1.68 1.68,1.68, height 0.25
KH3216-A55 [mm]
  rect 1.8x1 smd: 1(0,-1.651) 2(0,1.549)
  silkscreen extent -1.27,-2.51 1.27,2.41
LFL212G45TC1A007 [mil]
  rect 27x14 smd paste+0 mask+0: 1(25,25.59) 2(25,0) 3(25,-25.59) 5(-25,-25.59) 6(-25,0) 7(-25,25.59)
  rect 14x27 smd paste+0 mask+0: 4(0,-41) 8(0,41)
  silkscreen extent -32,-48 32,48, body extent 0,0 10,10, height 10
M24512-DFMC6TG [mil]
  rect 31.51x9.83 smd paste+0 mask+0: 1(-58.06,33.55) 2(-58.06,13.85) 3(-58.06,-5.85) 4(-58.06,-25.55) 5(56.06,-25.55) 6(56.06,-5.85) 7(56.06,13.85) 8(56.06,33.55)
  silkscreen extent -99,-42 35,50
NFC-ANT [mil]
  round 80 hole 40: 1(-120,0) 2(120,0)
  silkscreen extent -170,-50 170,50
ST25DV64K-JFR6D3 [mil]
  rect 10.06x10.03 smd paste+0 mask+0: 1(-48,49.21) 2(-48,29.53) 3(-48,9.84) 4(-48,-9.84) 5(-48,-29.53) 6(-48,-49.21) 7(48,-49.21) 8(48,-29.53) 9(48,-9.84) 10(48,9.84) 11(48,29.53) 12(48,49.21)
  rect 55x100 smd paste+0 mask+0: 13(0,0)
  silkscreen extent -79,-64 34,64
STM-SOT23-6L_V [mm] "SOT23, 6-Leads, Body 3.05x1.75mm, Pitch 0.95mm"
  rect 1.2x0.6 smd: 1(-1.15,0.95) 2(-1.15,0) 3(-1.15,-0.95) 4(1.15,-0.95) 5(1.15,0) 6(1.15,0.95)
  silkscreen extent -1.27,-1.55 0.15,1.92, body extent -1.6,-1.53 1.6,1.53, height 1.45
USB4510-03-1-A [mil]
  rect 24x43 smd paste+0 mask+0: A1-B12(-125,155.5) A4-B9(-93.5,155.5) B1-A12(127,155.5) B4-A9(95.5,155.5)
  rect 12x43 smd paste+0 mask+0: A5(-48.2,155.5) A6(-8.8,155.5) A7(10.9,155.5) A8(50.3,155.5) B5(70,155.5) B6(30.6,155.5) B7(-28.5,155.5) B8(-68,155.5)
  oval 39x87 hole 24 slot 72 at 90 deg: GND(-220.25,-47.2) GND(222.25,-47.2)
  oval 39x71 hole 24 slot 56 at 90 deg: GND(-220.25,110.25) GND(222.25,110.25)
VIBRO [mil]
  rect 40x40 smd mask+1: 1(40,0) 2(-40,0)
  silkscreen extent -65,-455 65,25

## Part data
C1 C2 C3 C4 C5 C6 C7 C8 C9 C10 C11 C12 C13 C14 C15 C16 C17 C18 C19 C20 C21 C22 C23 C24 C25 C26 C27 C28 C29: library part CMP-2008-04515-1, Manufacturer=Murata, Part Number=GRM155F50J684ZE01D
D4: library part CMP-2000-05378-1, "Very low capacitance ESD protection, 3.5 pF, -40 to 125 degC, 6-Pin SOT23, RoHS, Tape and Reel", Capacitance Value=3.5pF, Clamping Voltage=17V, Leakage Current=0.15uA, Manufacturer=STMicroelectronics, Operating Temp Range=-40Cto125C, Operating Temperature Classification=Automotive, Operating Temperature Max Deg. C=125C, Operating Temperature Min Deg. C=-40C, Package / Case=SOT-23, Package Description="6-Pin Small Outline Transistor, Body 2.925 x 1.625 mm, Pitch 0.95 mm", Package Reference=SOT23-6L, Peak Pulse Current=5A, Reverse Breakdown Voltage=6V, Reverse Stand-off Voltage=5V, Test Current (It)=1mA, Clamping Voltage (Max)=17V, Configuration=Dual, Datasheet URL=http://www.st.com/st-web-ui/static/active/en/resource/technical/document/datasheet/CD00050750.pdf, Datasheet Version="Rev. 5, 10/2011", Direction Type=Uni-Directional, Leakage Current (Max)=0.15uA, Manufacturer URL=http://www.st.com/, Mounting=SurfaceMount, Mounting Style=SurfaceMount, Number of Elements=1, Packaging=TapeandReel, Pin Count=6, Polarity=Uni-Directional, Product Depth (mm)=1.75mm, Product Height (mm)=1.3mm, Product Length (mm)=3.05mm, Rad Hardened=No, Suppressor Type=DiodeArrays, Working Voltage=5V, Working Voltage (Max)=5V
J2: library part CMP-2000-05908-2, "CONN HEADER VERT 5POS 2MM", Color=Natural, Contact Resistance=20mR, Current Rating=2A, Flammability Rating="UL94 V-0", Housing Color=White, Insulation Resistance=1MR, Max Operating Temperature=85°C, Max Voltage Rating (AC)=100V, Min Operating Temperature=-25°C, Connector Type=Header, Contact Finish - Mating=TIN, Contact Material=Brass, Contact Mating Length=0.13inch, Contact Plating=Tin, Contact Shape=Square, Contact Type="Male Pin", Depth=4.5mm, Fastening Type=Detent, Gender=Male, Height=9.4mm, Housing Material=Polyamide, Insulation Color=Natural, Insulation Material=Nylon, Lead Free="Lead Free", Lead Pitch=2mm, Length=11.9mm, Mated Stacking Heights=8mm, Material=Polyamide, Max Current Rating=2A, Mount="Through Hole", Number of Contacts=5, Number of Pins=5, Number of Poles=5, Number of Positions=5, Number of Rows=1, Orientation=Straight, Packaging=Bulk, Pitch=2mm, REACH SVHC="No SVHC", Series=PH, Termination=Solder, Voltage Rating=100V, Voltage Rating (AC)=100V, Width=4.5mm, Working Voltage=100V
L1: library part CMP-2000-06587-2, "FIXED IND 10UH 100MA 780MOHM SMD", Case Code (Imperial)=0805, Case Code (Metric)=2012, Current Rating=100mA, DC Resistance (DCR)=780mR, Inductance=10uH, Max Operating Temperature=125°C, Min Operating Temperature=-55°C, Package Quantity=3000, Self Resonant Frequency=15MHz, Test Frequency=1MHz, Tolerance=20%, Case/Package=0805, Core Material=Ferrite, DC Current=100mA, Depth=1.45mm, Height=1.45mm, Height - Seated (Max)=0.057inch, Lead Free="Lead Free", Length=2.2mm, Max DC Current=100mA, Military Standard=Not, Mount="Surface Mount", Packaging="Tape and Reel", Radiation Hardening=No, Rated Current-Max=100mA, RoHS Compliant=Yes, Saturation Current=100mA, Series=LQM21F_70, Shielding=Shielded, Termination=SMD/SMT, Width=0.049inch
L2: library part CMP-06042-005237-1, "Multilayer type Inductor for Automotive 10nH ±5% 0.19Ω 500mA 0402", Case Code (Imperial)=0402, Case Code (Metric)=1005, Current Rating=500mA, DC Resistance (DCR)=190mR, Inductance=10nH, Max Operating Temperature=125°C, Min Operating Temperature=-55°C, Ratings=AEC-Q200, Self Resonant Frequency=3.3GHz, Test Frequency=100MHz, Tolerance=5%, Case/Package=0402, Core Material=Air, Mount="Surface Mount", Packaging="Cut Tape", Shielding=Unshielded
L3: library part CMP-0686-00187-4, "Chip Ferrite Bead, 0402, 600Ω @ 100MHz, 0.52Ω, 25%, 300mA", Case Code (Imperial)=0402, Case Code (Metric)=1005, Current Rating=300mA, DC Resistance (DCR)=520mR, DC Resistance-Max=600mR, Frequency=100MHz, Max Operating Temperature=125°C, Min Operating Temperature=-55°C, Package Quantity=10000, Tolerance=25%, Case/Package=0402, Core Material=Ferrite, DC Current=300mA, Depth=0.55mm, Height=0.5mm, Impedance=600R, Lead Free="Lead Free", Length=1mm, Material=Steel, Max Current Rating=300mA, Max DC Current=300mA, Military Standard=Not, Number of Circuits=1, Number of Lines=1, Number of Pins=2, Packaging="Tape and Reel", Radiation Hardening=No, REACH SVHC="No SVHC", RoHS Compliant=Yes, Series=BLM15AG_SN, Shielding=Unshielded, Termination=SMD/SMT, Test Frequency=100MHz, Width=0.5mm
L5: library part CMP-2000-06580-2, "Multilayer type RF Inductor 2.7nH ±0.3nH 0.12Ω 800mA 0402", Case Code (Imperial)=0402, Case Code (Metric)=1005, Current Rating=300mA, DC Resistance (DCR)=150mR, Inductance=2.7nH, Max Operating Temperature=125°C, Min Operating Temperature=-55°C, Package Quantity=10000, Self Resonant Frequency=6GHz, Test Frequency=100MHz, Case/Package=0402, Core Material=Air, DC Current=300mA, Depth=0.55mm, Height=0.5mm, Height - Seated (Max)=0.022inch, Lead Free="Lead Free", Length=1mm, Max DC Current=300mA, Military Standard=Not, Mount="Surface Mount", Packaging="Tape and Reel", Q Factor=8, Radiation Hardening=No, Shielding=Unshielded, Termination=SMD/SMT, Width=0.5mm
MD1: library part CMP-12074-000002-1, "RF FILTER LOW PASS 2.45GHZ 6SMD"
O1: library part CMP-200220-000017-1, "CRYSTAL 32.0000MHZ 8PF SMD", Case/Package=SMD/SMT, ESR (Equivalent Series Resistance)=60R, Frequency=32MHz, Load Capacitance=8pF, Max Operating Temperature=125°C, Min Operating Temperature=-40°C, Ratings=AEC-Q200, Mount="Surface Mount", Packaging="Tape and Reel"
O2: library part CMP-200220-000019-1, "CRYSTAL 32.7680KHZ 12.5PF SMD", Case/Package=SMD/SMT, ESR (Equivalent Series Resistance)=80kR, Frequency=32.768kHz, Frequency Tolerance=20ppm, Load Capacitance=12.5pF, Max Operating Temperature=85°C, Min Operating Temperature=-40°C, Height=0.024inch, Length=0.081inch, Mount="Surface Mount", Packaging="Cut Tape", RoHS Compliant=Yes, Series=NX2012SA, Width=0.047inch
Q1: library part CMP-2000-06172-1, "N-Channel Enhancement Mode MOSFET, 20 V, -55 to 150 degC, 3-Pin SOT23, RoHS, Tape and Reel", Drain-Source On Resistance-Max=29mO, Drain-to-Source Voltage [Vdss]=20V, Manufacturer="Diodes Inc", Package Description="3-Pin Small Outline Transistor, Body 2.9 x 1.3 mm, Pitch 0.96 mm", Package Reference=SOT23-3, Rated Power Dissipation=740mW, Channel Type=N-Channel, Datasheet URL=http://www.diodes.com/_files/datasheets/ds31867.pdf, Datasheet Version="Rev. 5-2, 09/2013", Manufacturer URL=http://www.diodes.com/, Mounting Technology=SurfaceMount, Qg Gate Charge=5.4nC
R1 R2 R3 R4 R5 R6 R7 R8 R9 R10 R11 R12 R13 R14 R15 R16 R17 R18 R19: library part CMP-13261-000953-1, "Res Thick Film 0402 1.87kΩ 1% 0.063W ±100ppm/°C Molded SMD T/R", Case Code (Imperial)=0402, Case Code (Metric)=1005, Max Operating Temperature=155°C, Max Power Dissipation=63mW, Min Operating Temperature=-55°C, Package Quantity=1, Resistance=1.87kR, Temperature Coefficient=100ppm/°C, Tolerance=1%, Voltage Rating (DC)=50V, Case/Package=0402, Composition="Thick Film", Contact Plating=Tin, Depth=0.5mm, Features="Moisture Resistant", Height=0.016inch, Lead Free="Lead Free", Length=1mm, Military Standard=Not, Number of Terminations=2, Packaging="Tape and Reel", Power Rating=63mW, Radiation Hardening=No, Width=0.02inch
U1: library part CMP-0244-00328-2, "IC REG LINEAR 3.3V 150MA SOT23-5", Case/Package=SOT-23, Dropout Voltage=60mV, Input Bias Current=85uA, Max Input Voltage=6V, Max Operating Temperature=125°C, Max Output Current=150mA, Min Current Limit=300mA, Min Input Voltage=2.5V, Min Operating Temperature=-40°C, Min Output Voltage=3.3V, Output Voltage Accuracy=2%, Package Quantity=1, Quiescent Current=150uA, Accuracy=2%, Height=1.3mm, Lead Free="Lead Free", Length=3mm, Mount="Surface Mount", Number of Outputs=1, Number of Pins=5, Number of Regulators=1, Output Current=150mA, Output Type=Fixed, Output Voltage=3.3V, Packaging="Tape and Reel", Polarity=Positive, Radiation Hardening=No, Width=1.75mm
U3: library part CMP-12147-000005-1, "IC BATT CHRGR ION/POLY 16-VFQFPN", Manufacturer=STMicroelectronics, Max Junction Temp=+125°C, Max Power Dissipation=0.67W, Max Supply Voltage=12V, Min Supply Voltage=2.5V, Nominal Supply Current=1.8mA, Output Current=975mA, Output Voltage=4.2V, Package=VFQFPN16-7185330, Temperature="-40°C to +125°C", Temperature Range Low=-40°C, Automotive=No, Category=IC, ComponentLink2Description=Datasheet, ComponentLink2URL=https://www.st.com/resource/en/datasheet/l6924d.pdf, Device Class L1="Integrated Circuits (ICs)", Device Class L2="Power Management ICs", Device Class L3="Battery Management", Digikey Description="IC BATT CHRGR ION/POLY 16-VFQFPN", Footprint Url=https://www.st.com/resource/en/datasheet/l6738.pdf, Height=1mm, Ipc Land Pattern Name=QFN50P300X300X90-16, Lead Free=Yes, Manufacturer Part Number=L6924D013TR, Mouser Description="Battery Management Battery Charger Sys Li-Ion/Li-Poly", Number Of Cells=1, Number of Outputs=1, Octopart=https://octopart.com/l6924d013tr-stmicroelectronics-421996, RoHS=TRUE, Standoff Height=0.02mm, Temperature Range High=+125°C
U4: library part CMP-12182-000004-1, "MEMS NANO PRESSURE SENSOR: 260-1", Manufacturer=STMicroelectronics, Max Supply Voltage=3.6V, Min Supply Voltage=1.7V, Operating Supply Current=3-12uA, Package=HLGA-10L-8479831, Temperature="-40°C to +85°C", Temperature Range High=+85°C, Temperature Range Low=-40°C, Automotive=No, Category=IC, ComponentLink2Description=Datasheet, ComponentLink2URL=https://www.st.com/resource/en/datasheet/lps22hb.pdf, Device Class L1=Sensors, Device Class L2="Pressure Sensors", Device Class L3=unset, Digikey Description="MEMS NANO PRESSURE SENSOR: 260-1", Footprint Url=https://www.st.com/content/ccc/resource/technical/document/technical_note/73/17/9c/16/dd/96/4a/01/CD00134799.pdf/files/CD00134799.pdf/jcr:content/translations/en.CD00134799.pdf, Height=0.8mm, Lead Free=Yes, Manufacturer Part Number=LPS22HBTR, Octopart=https://octopart.com/lps22hbtr-stmicroelectronics-51851131, Port Style="No Port", RoHS=TRUE, Sensor Output=I2C,SPI
U5: library part CMP-12177-000016-1, "CONSUMER MEMS", RoHS Compliant=Yes
U7: library part CMP-12105-000013-1, "ULTRA-LOW-POWER DUAL CORE ARM CO", Ambient Temperature Range High=+85°C, Ambient Temperature Range Low=-40°C, Frequency=64MHz, Manufacturer=STMicroelectronics, Max Junction Temp=+105°C, Max Supply Voltage=3.6V, Min Supply Voltage=1.71V, Package=UFQFPN48, Temperature="-40°C to +105°C", Automotive=No, Category=IC, ComponentLink2Description=Datasheet, ComponentLink2URL=https://www.st.com/resource/en/datasheet/stm32wb55cg.pdf, Core Architecture="ARM Cortex-M4", Data Bus Width=32bits, Device Class L1="Integrated Circuits (ICs)", Device Class L2="Embedded Processors and Controllers", Device Class L3=Microcontrollers, Digikey Description="ULTRA-LOW-POWER DUAL CORE ARM CO", Height=0.65mm, Interface=I2C,SPI,UART,USART,2-Wire,USB,IrDA,Other, Lead Free=Yes, Manufacturer Part Number=STM32WB55CGU6, Memory Size=1MBytes, Memory Type=FLASH, Number Of A/D Converters=1, Number Of Adc Channels=13, Number Of Cores=1, Number Of I2C Channels=2, Number Of I/Os=30, Number Of Pwm Channels=14, Number Of Spi Channels=1, Number Of Timers/Counters=6, Number Of Uart Channels=2, Number Of Usb Channels=1, Octopart=https://octopart.com/stm32wb55cgu6-stmicroelectronics-98750847, Ram Size=256KBytes, RoHS=TRUE, Standoff Height=0mm, Temperature Range High=+105°C, Temperature Range Low=-40°C

## Via types
v1: diameter 23.62, hole 11.81, Top Layer to Bottom Layer, 52 vias

## Nets (pads, with @x,y where several pads share a name; then routed paths per layer and width w, separated by ;. In a path a pad name is that pad's centre, name@x,y a point inside that pad or via, vN(x,y) a via of type N, cw(c..) or ccw(c..) an arc to the next point about the centre after c; other vN are vias at no path point)
+3.3: C3.2 C8.2 C9.2 C10.2 C11.2 C13.1 C14.1 C15.2 C16.1 C17.2 C18.1 C19.2 C20.2 C21.1 C22.2 C26.2 D2.1 J2.4 L3.1 R5.2 R6.2 R7.1 R9.1 R13.2 R15.2 R16.2 R17.2 R19.2 U1.5 U2.1 U2.2 U2.8 U4.1 U4.6 U4.10 U5.1 U5.5 U5.8 U5.12 U6.10 U6.12 U7.1 U7.20 U7.23 U7.34 U7.35 U7.40 U7.48 V.2 | length 8582.9
  Top Layer w11.81: C14.1 161.17,567.61 162.33,568.78 162.33,607.55 R13.2 ; C14.1@170.54,561.02 202.17,561.02 ; v1(202.17,594.29) 202.17,561.02 ; C19.2 204.17,437.21 217.17,424.21 v1(217.17,400.29) ; C19.2@204.17,486.97 246.17,486.97 247.84,485.29 261.17,485.29 277.84,501.97 U7.23 ; U7.20 202.17,561.02 ; L3.1 398.08,822.04 391.17,828.96 C17.2 390.83,856.63 355.65,856.63 v1(355.31,856.3) 297.24,856.3 286.42,867.13 286.42,925.2 300.34,939.12 379.92,939.12 ; v1(434.64,1043.08) 434.64,1044.69 416.83,1062.5 ; R19.2 475.17,890.2 475.17,912.29 466.17,921.29 466.17,938.75 R17.2 402.37,938.98 402.23,939.12 379.92,939.12 ; v1(494.09,192.91) 637.8,192.91 v1(692.91,248.03) 692.91,274.61 712.6,294.29 v1(819.88,294.29) 820.37,293.8 885.73,293.8 C3.2 885.04,292.13 885.04,199.02 U1.5 ; U7.34 520.67,330.71 532.87,318.5 C20.2 C21.1 602.36,351.38 ; U7.35 540.35,424.21 559.06,405.51 559.06,381.3 C15.2 559.45,358.3 566.37,351.38 602.36,351.38 ; U7.1 560.04,749.02 581.1,770.08 ; C26.2 581.1,770.08 ; U7.40 645.21,541.34 662.49,558.61 C22.2 689.81,559.26 845.81,559.26 R9.1 911.71,559.9 920.43,551.18 982.28,551.18 1006.89,575.79 1006.89,777.56 1094.49,865.16 1094.49,883.86 ; U7.48 608.27,698.82 630.32,720.87 ; v1(644.68,1052.17) 597.44,1099.41 453.74,1099.41 416.83,1062.5 ; v1(652.56,319.88) 621.06,351.38 602.36,351.38 ; R15.2 810.17,715.29 825.17,730.29 825.17,753.29 808.17,770.29 752.17,770.29 732.17,750.29 R16.2 710.03,713.2 702.36,720.87 C16.1 630.32,720.87 ; J2.4 953.74,670.28 1006.89,670.28 ; v1(1062.01,1002.95) 1062.01,999.76 1080.97,980.79 1080.97,897.38 1094.49,883.86 ; v1(1125,886.81) 1123.03,884.84 1095.47,884.84 1094.49,883.86 ; 379.92,939.12 379.92,1025.59 416.83,1062.5 ; 581.1,770.08 628.54,770.08 v1(628.94,769.68) 630.32,768.31 630.32,720.87
  Bottom Layer w11.81: v1(202.17,594.29) 202.17,418.49 217.17,403.49 v1(217.17,400.29) 187.99,371.12 187.99,336.61 210.63,313.98 421.26,313.98 455.71,279.53 455.71,209.65 470.18,195.17 491.83,195.17 v1(494.09,192.91) v1@495.08,192.91 ; U4.6 320.87,996.56 339.57,1015.26 354.82,1015.26 U4.1 424.17,1016.24 434.64,1026.72 v1(434.64,1043.08) ; U4.10 345.47,1056.1 353.35,1063.98 C8.2 400.59,1093.5 434.64,1059.45 v1(434.64,1043.08) ; V.2 573.17,48.58 D2.1 579.77,49.21 616.14,49.21 652.56,85.63 652.56,248.03 ; U2.1 567.83,574.72 576.77,583.66 576.77,586.61 568.97,594.42 U2.2 ; R5.2 540.35,985.24 482.51,1043.08 v1(434.64,1043.08) ; U5.1 609.25,881.89 588.58,881.89 568.76,862.06 R6.2 ; v1(628.94,769.68) 586.61,812.01 570.87,812.01 543.75,839.12 543.75,858.67 R6.2 ; v1(644.68,1052.17) 627.56,1035.04 C9.2 627.56,984.65 636.32,975.89 U5.5 637.3,947.34 637.3,930.09 674.7,892.69 674.7,877.46 U5.12 676.67,875.49 676.67,853.84 688.1,842.41 785.32,842.41 886.81,943.9 944.88,943.9 ; U2.8 858.18,574.72 J2.4 ; v1(652.56,319.88) 652.56,248.03 ; v1(692.91,248.03) 652.56,248.03 ; U5.8 701.77,964.57 719.09,981.89 C10.2 877.95,1010.83 944.88,943.9 ; v1(819.88,294.29) 819.88,365.16 659.45,525.59 604.72,525.59 577.14,553.18 577.14,645.3 531.5,690.94 457.68,690.94 353.35,795.28 353.35,854.33 v1(355.31,856.3) 361.08,862.06 R6.2 ; v1(1062.01,1002.95) 1065.2,1002.95 1075.89,992.27 R7.1 1109.38,993.38 1162.27,993.38 C11.2 1164.14,993.73 1186.39,993.73 1197.83,982.28 U6.12 ; v1(1125,886.81) 1121.8,886.81 1113.93,894.68 994.09,894.68 944.88,943.9 ; v1@1127.26,886.12 1132.92,886.12 1145.28,898.47 C13.1 1149.04,927 1177,927 1192.91,942.91 U6.10
GND: B.2 C1.1 C2.1 C3.1 C4.1 C5.2 C6.2 C7.1 C8.1 C9.1 C10.1 C11.1 C13.2 C14.2 C15.1 C16.2 C17.1 C18.2 C19.1 C20.1 C21.2 C22.1 C23.2 C24.1 C25.1 C26.1 C27.2 C28.2 C29.2 D4.2 J2.1 MD1.A2 MD1.B1 MD1.B2 MD1.B3 MD2.1 MD2.3 MD2.5 MD2.7 O1.2 O1.4 Q1.2 R1.2 R2.2 R4.2 R10.1 R11.2 R14.2 R18.2 U1.2 U2.3 U2.4 U3.6 U3.7 U3.9 U4.3 U4.5 U4.8 U4.9 U5.6 U5.7 U6.6 U7.22 U7.32 U7.49 USB.A1-B12 USB.B1-A12 USB.GND | length 3743.4
  Top Layer w11.81: MD1.B1 MD1.B2 ; R14.2 126,607.55 126,568.13 C14.2@126.22,567.91 ; C14.2 C14.2@126.22,567.91 ; MD2.5 125.11,223.67 115.27,233.51 ; MD2.7 132.98,274.85 115.27,257.13 115.27,233.51 ; C19.1@204.13,514.65 C28.2 C29.2 161.66,367.92 168.58,361 217.52,361 217.59,360.93 229.62,360.93 245.08,345.47 272.64,345.47 281.5,336.61 281.5,299.21 295.28,285.43 383.86,285.43 ; C19.1 C18.2 ; MD2.3 232.39,223.67 243.22,234.5 243.22,249.75 ; MD2.1 233.38,274.85 243.22,265.01 243.22,249.75 ; C18.2@246.17,521.61 246.2,521.65 U7.22 382.87,521.65 U7.49 481.3,561.02 U7.32 481.3,427.17 474.02,419.88 474.02,413.39 474.41,413.78 ; v1(310.04,880.91) 320.75,891.61 366.26,891.61 ; O1.2 v1(366.14,387.8) ; v1(353.35,915.49) 355.61,913.23 355.61,902.27 366.26,891.61 ; v1(412.16,962.6) 415.35,962.6 430.12,977.36 R18.2 ; C25.1 C17.1 366.26,891.61 ; C27.2 473.43,400 473.43,380.91 477.36,376.97 477.36,315.94 463.58,302.17 400.59,302.17 383.86,285.43 ; C24.1 C23.2 ; C21.2 C20.1 560.04,237.2 539.37,216.54 401.57,216.54 383.86,234.25 383.86,248.03 ; C22.1 689.76,523.37 809.44,523.37 R10.1 v1(851.24,522.78) ; C1.1 920.57,56.79 920.57,106.59 U1.2 U1.2@921.46,107.48 ; C3.1 C3.1@921.65,293.31 ; C3.1@921.26,292.91 921.26,251.97 C2.1@921.46,251.77 ; C6.2 1054.33,255.71 1100.06,255.71 R1.2 ; U3.6 1135.83,101.6 1142.75,94.68 1155.51,94.68 ; C5.2@1150.59,68.5 C5.2 1155.51,74.21 1155.51,94.68 ; U3.7 1155.51,94.68 ; U3.9 1220.47,137.8 ; R4.2@1296.8,261.27 1300.2,257.87 R4.2 ; MD1.B2 MD1.B3 63.1,524.72 106.3,567.91 C14.2@126.22,567.91 ; MD1.B2 MD1.A2 105.43,223.67 115.27,233.51 ; 243.22,249.75 382.14,249.75 383.86,248.03 ; 383.86,248.03 383.86,285.43
  Bottom Layer w11.81: U4.5 306.1,888.04 310.04,884.1 v1(310.04,880.91) ; U4.8 307.09,1037.4 307.09,1054.89 314.01,1061.81 325.79,1061.81 ; C8.1@318.9,1095.28 317.91,1094.29 C8.1 319.49,1093.5 325.79,1087.2 325.79,1061.81 ; U4.9 325.79,1061.81 ; U4.3 398.38,976.38 v1(412.16,962.6) 411.42,961.86 411.42,940.94 385.83,915.35 353.49,915.35 v1(353.35,915.49) ; R11.2@508.72,446.85 R11.2 ; U5.6 656,969.95 662.92,976.87 675.69,976.87 ; U5.7 675.69,976.87 ; C10.1 684.45,985.63 675.69,976.87 ; v1(848.43,372.05) 800.2,420.28 800.2,471.74 v1(851.24,522.78)
  other v1: 217.52,363.19 118.11,789.37 1213.98,1029.13 567.25,1062.39 466.54,1071.85
NetANT1_1: ANT1.1 C12.2 U6.5 | length 384.2
  Bottom Layer w11.81: U6.5 1399.61,903.54 1434.65,938.58 C12.2 1511.81,1023.62 1535.43,1047.24 ANT1.1
NetANT1_2: ANT1.2 C12.1 U6.4 | length 341.7
  Bottom Layer w11.81: ANT1.2 1295.43,1051.34 1323.15,1023.62 C12.1 1400,940.35 1382.87,923.23 U6.4
NetANT2_1: ANT2.1 MD1.A1 MD2.4 | length 216.7
  Top Layer w11.81: MD1.A1 82.79,183.32 99.52,166.58 134.46,166.58 169.4,166.58 182.2,179.38 MD2.4 ; ANT2.1 139.72,161.32
NetC2_2: C2.2 U1.4 | length 55.1
  Top Layer w11.81: C2.2 957.48,250.79 957.48,199.02 U1.4
NetC5_1: C5.1 U3.5 | length 46.5
  Top Layer w11.81: C5.1 1116.14,69.49 U3.5
NetC7_2: C7.2 R3.1 U3.12 | length 101.9
  Top Layer w11.81: U3.12 1254.78,196.85 R3.1 1255.77,195.87 1269.68,195.87 1277.56,187.99 1294.69,187.99 C7.2
NetC23_1: C23.1 O2.1 U7.2 | length 254
  Top Layer w11.81: U7.2 540.35,823.82 560.04,843.5 585.63,843.5 593.53,851.41 O2.1@593.53,886.78 ; O2.1 C23.1
NetC24_2: C24.2 O2.2 U7.3 | length 217.7
  Top Layer w11.81: U7.3 520.67,885.83 O2.2@521.65,886.81 ; C24.2 533.46,887.8 O2.2
NetC25_2: C25.2 J2.5 R19.1 U7.7 | length 1111.3
  Top Layer w11.81: C25.2 434.37,858.18 472.96,858.18 R19.1 474.17,763.54 v1(473.43,762.8) 454.66,762.8 441.93,750.06 U7.7
  Bottom Layer w11.81: v1(473.43,762.8) 516.73,762.8 600.39,679.13 600.39,570.87 621.06,550.2 982.28,550.2 1005.91,573.82 1005.91,727.36 986.42,746.85 953.94,746.85 J2.5
NetC27_1: C27.1 L1.2 U7.31 | length 119
  Top Layer w11.81: L1.2@437.01,348.43 L1.2@438.39,349.8 ; L1.2@439.37,349.8 C27.1 439.96,401.18 439.96,422.27 461.61,443.93 U7.31
NetC28_1: C28.1 L5.1 MD1.A3 U7.21 | length 586.6
  Top Layer w11.81: MD1.A3 82.79,515.86 108.27,541.34 135.21,541.34 ; C28.1 126.17,515.5 126.17,532.29 135.21,541.34 ; C28.1@127.31,514.36 127.31,474.73 L5.1@127.61,474.44 ; U7.21 135.21,541.34
NetC29_1: C29.1 L5.2 MD2.8 | length 178
  Top Layer w11.81: L5.2@127.61,444.63 127.31,444.34 127.31,404.71 C29.1 127.02,368.09 133.93,361.17 134.89,361.17 181.1,314.96 181.1,291.35 MD2.8
NetD2_2: D2.2 Q1.1 V.1 | length 225.7
  Bottom Layer w11.81: V.1 555.75,128.58 576.79,149.62 D2.2 577.27,188.51 577.27,289.87 Q1.1
NetD4_1: D4.1 U7.37 | length 815.7
  Top Layer w11.81: U7.37 633.06,482.28 666.24,449.11 816.64,449.11 v1(833.66,432.09) ; D4.1 1136.81,657.48 v1(1136.81,718.5)
  Bottom Layer w11.81: v1(833.66,432.09) 872.05,470.47 974.41,470.47 1085.63,581.69 1085.63,687.01 1117.13,718.5 v1(1136.81,718.5)
NetD4_3: D4.3 U7.38 | length 609.8
  Top Layer w11.81: U7.38 638.43,501.97 668.97,471.43 746.39,471.43 746.81,471.01 973.97,471.01 1084.65,581.69 D4.3
NetD4_4: D4.4 USB.A6 | length 94.9
  Top Layer w11.81: D4.4@1226.38,580.71 1227.33,581.66 1320.78,581.66 USB.A6
NetD4_6: D4.6 USB.A7 | length 136.9
  Top Layer w11.81: D4.6 1264.76,656.5 1273.62,647.64 1273.62,614.17 1286.34,601.45 USB.A7
NetJ2_2: J2.2 R10.2 U7.39 | length 387.8
  Top Layer w11.81: U7.39 643.8,521.65 672.07,493.39 809.62,493.39 R10.2 810.11,493.04 924.4,493.04 943.17,511.81 J2.2
NetJ2_3: J2.3 R9.2 U7.41 | length 381.4
  Top Layer w11.81: U7.41 638.9,561.02 668.91,591.04 845.12,591.04 R9.2 846.88,590.13 952.33,590.13 J2.3
NetL1_1: L1.1 L2.1 | length 52.2
  Top Layer w11.81: L1.1 L2.1
NetL2_2: L2.2 U7.33 | length 211.6
  Top Layer w11.81: U7.33 500.98,324.8 524.61,301.18 L2.2
NetL3_2: L3.2 U7.8 | length 71.6
  Top Layer w11.81: U7.8 422.24,762.37 432.22,772.34 432.22,789.59 L3.2
NetO1_1: O1.1 U7.25 | length 213
  Top Layer w11.81: O1.1 374.02,334.65 393.7,354.33 393.7,398.62 375.98,416.34 359.25,416.34 343.5,432.09 U7.25
NetO1_3: O1.3 U7.24 | length 127.8
  Top Layer w11.81: O1.3 281.5,475.36 288.42,482.28 U7.24
NetQ1_3: Q1.3 R11.1 R12.1 | length 110.3
  Bottom Layer w11.81: R11.1 539.86,417.18 ; Q1.3 540.35,416.69 539.86,417.18 ; R12.1 539.86,417.18
NetR1_1: R1.1 U3.15 | length 40.2
  Top Layer w11.81: R1.1 1132.43,257.87 1135.83,254.48 U3.15
NetR2_1: R2.1 U3.13 U7.16 | length 1640.5
  Top Layer w11.81: v1(202.9,710.63) 204.67,710.63 275.53,639.76 U7.16 ; U3.13 1175.2,240.16 1199.8,264.76 ; v1(1199.8,311.02) 1199.8,264.76 ; R2.1 1199.8,264.76
  Bottom Layer w11.81: v1(202.9,710.63) 204.67,710.63 407.42,507.87 652.11,507.87 714.57,445.42 714.57,395.67 762.8,347.44 762.8,270.67 828.74,204.72 967.52,204.72 1108.27,345.47 1188.98,345.47 1197.54,336.91 1197.54,313.28 v1(1199.8,311.02)
NetR3_2: R3.2 R4.1 U3.8 | length 404.3
  Top Layer w11.81: U3.8 1175.2,93.5 v1(1198.82,69.88) ; R3.2 1255.27,226.87 1299.85,226.87 R4.1 v1(1336.75,227.22)
  Bottom Layer w11.81: v1(1198.82,69.88) 1198.82,179.13 1246.91,227.22 v1(1336.75,227.22)
NetR5_1: R5.1 U4.2 U5.3 | length 286.2
  Bottom Layer w11.81: U4.2@356.16,996.91 U4.2 461.12,996.56 519.52,938.15 536.96,938.15 540.35,934.76 R5.1 562.15,933.91 573.82,922.24 U5.3
NetR6_1: R6.1 U4.4 U5.2 | length 369.3
  Bottom Layer w11.81: U4.4 325.79,898.79 332.71,891.87 R6.1 565.1,891.87 575.79,902.56 U5.2
NetR7_2: R7.2 U6.11 U7.45 | length 996.2
  Top Layer w11.81: U7.45 829.72,639.76 843.5,653.54 843.5,776.18 785.43,834.26 785.43,901.57 836.61,952.76 v1(1023.62,952.76)
  Bottom Layer w11.81: v1(1023.62,952.76) 1023.91,953.05 1065.39,953.05 1074.8,962.46 R7.2 1108.41,962.6 U6.11
NetR8_2: R8.2 USB.A5 | length 117.7
  Top Layer w11.81: R8.2 1248.03,521.65 1268.73,542.35 USB.A5
NetR12_2: R12.2 U7.36 | length 192.8
  Top Layer w11.81: U7.36 560.04,437.99 571.85,426.18 572.83,426.18 582.68,416.34 v1(634.84,416.34)
  Bottom Layer w11.81: R12.2 625.84,446.99 634.84,437.99 v1(634.84,416.34)
NetR13_1: R13.1 R14.1 U7.19 | length 217.5
  Top Layer w11.81: R14.1 191.67,638.2 249.15,580.71 U7.19
NetR15_1: R15.1 U2.6 U5.13 U6.8 U7.46 | length 1472.1
  Top Layer w11.81: U7.46 782.17,659.45 ; v1(795.17,743.29) 795.17,734.29 782.17,721.29 782.17,659.45 ; R15.1 810.17,662.84 806.77,659.45 782.17,659.45 ; v1(860.24,821.85) 860.24,865.9 876.97,882.63 v1(876.97,885.83)
  Bottom Layer w11.81: U2.6 741.53,614.12 860.24,732.82 v1(860.24,821.85) ; U5.13 656,843.01 674.32,824.69 795.17,824.69 ; v1(795.17,743.29) 795.17,824.69 ; U6.8 1183.61,903.54 1143.25,863.19 999.02,863.19 976.38,885.83 v1(876.97,885.83) 856.3,885.83 795.17,824.69
NetR16_1: R16.1 U2.5 U5.14 U6.7 U7.47 | length 1239.9
  Top Layer w11.81: U7.47 728.76,679.13 732.17,682.54 R16.1 732.17,684.23 735.56,687.63 750.5,687.63 763.17,700.29 v1(763.17,743.29)
  Bottom Layer w11.81: U5.14 636.32,872.05 637.3,871.06 637.3,865.63 637.3,836.66 666.98,806.98 725.5,806.98 763.17,769.31 v1(763.17,743.29) 762.8,742.92 762.8,718.5 778.54,702.76 ; U2.5 706.65,633.82 775.59,702.76 778.54,702.76 ; U6.7 1188.98,883.86 1149.61,844.49 977.36,844.49 963.58,858.27 861.22,858.27 820.87,817.91 820.87,718.5 805.12,702.76 778.54,702.76
NetR17_1: R17.1 R18.1 U7.4 | length 252
  Top Layer w11.81: R18.1@494.23,977.36 495.22,976.38 495.22,939.96 R17.1 ; R17.1@497.49,934.74 500.98,931.24 U7.4
NetU2_7: U2.7 U7.9 | length 478.3
  Top Layer w11.81: v1(394.68,796.26) 394.68,793.06 402.56,785.19 U7.9
  Bottom Layer w11.81: v1(394.68,796.26) 533.46,796.26 622.05,707.68 622.05,602.33 628.97,595.41 650.54,595.41 U2.7
NetU3_3: U3.3 U7.17 | length 1420.5
  Top Layer w11.81: v1(171.26,710.63) 171.26,708.86 260.05,620.08 U7.17 ; v1(1024.61,157.48) U3.3
  Bottom Layer w11.81: v1(171.26,710.63) 171.26,708.86 389.97,490.16 644.77,490.16 691.93,443 691.93,381.89 739.17,334.65 739.17,255.91 837.6,157.48 v1(1024.61,157.48)
NetU3_4: U3.4 U7.18 | length 1508.3
  Top Layer w11.81: v1(132.87,682.09) 133.86,683.07 172,683.07 254.68,600.39 U7.18 ; v1(1025.59,121.06) 1035.43,121.06 1052.17,137.8 U3.4
  Bottom Layer w11.81: v1(132.87,682.09) 135.13,679.83 161.95,679.83 369.34,472.44 634.84,472.44 666.34,440.94 666.34,376.97 718.5,324.8 718.5,239.17 836.61,121.06 v1(1025.59,121.06)
NetU3_14: U3.14 | length 96
  Top Layer w11.81: U3.14 1155.51,259.84 1166.34,270.67 v1(1166.34,311.02)
NetU4_7: U4.7 U7.13 | length 463.4
  Top Layer w11.81: v1(207.68,1015.75) 207.68,789.37 298.23,698.82 U7.13